# Altium PCB PCB2.PcbDoc (part 1 of 2)
Units mm, origin at the board's own origin, x right, y up, seen from the top; angles counter-clockwise.
Board outline 247 x 102 mm, 2 copper layers (Top Layer, Bottom Layer); 201 components, 195 nets, 868 pads, 143 vias.
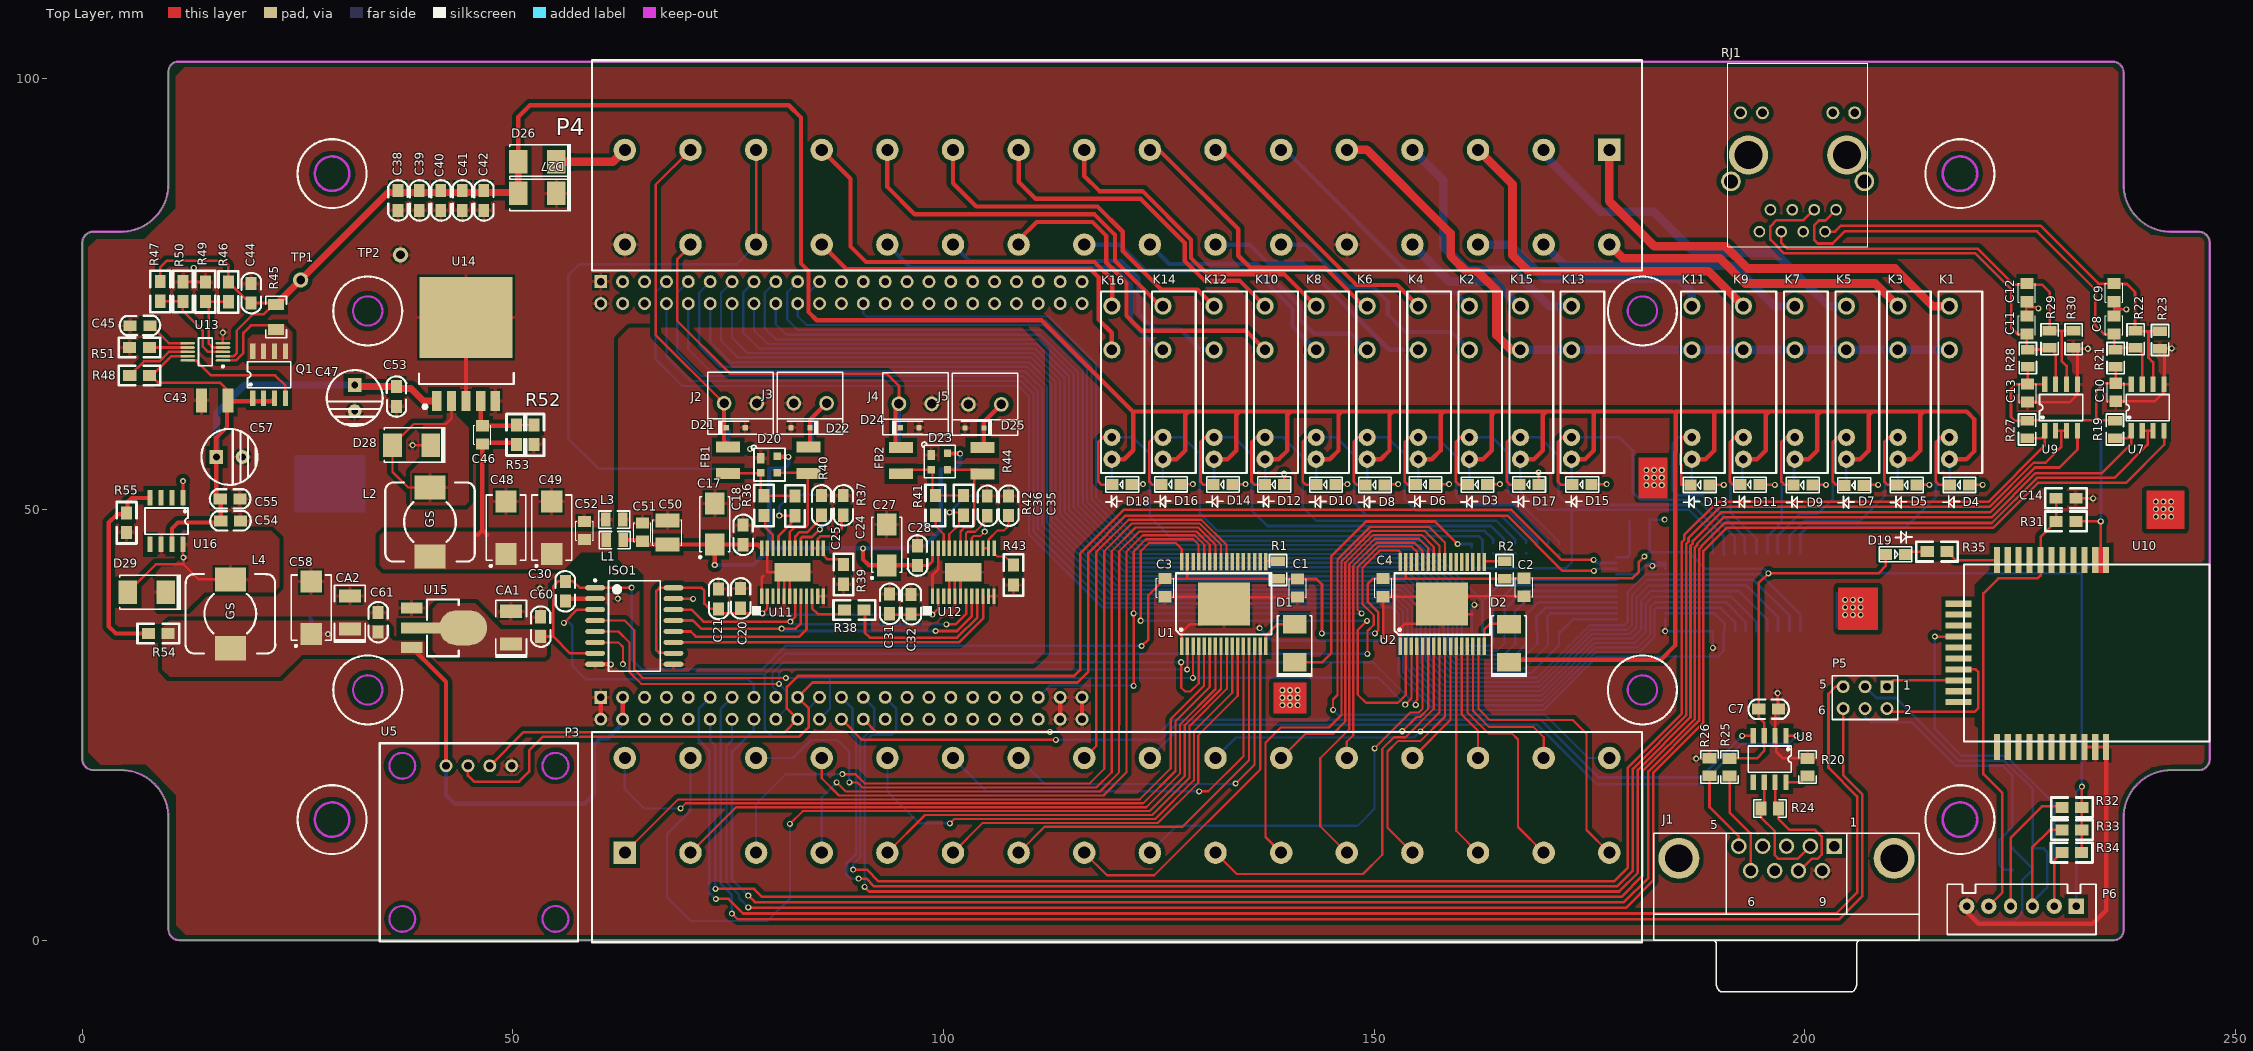
[diagram p0: Top Layer view]
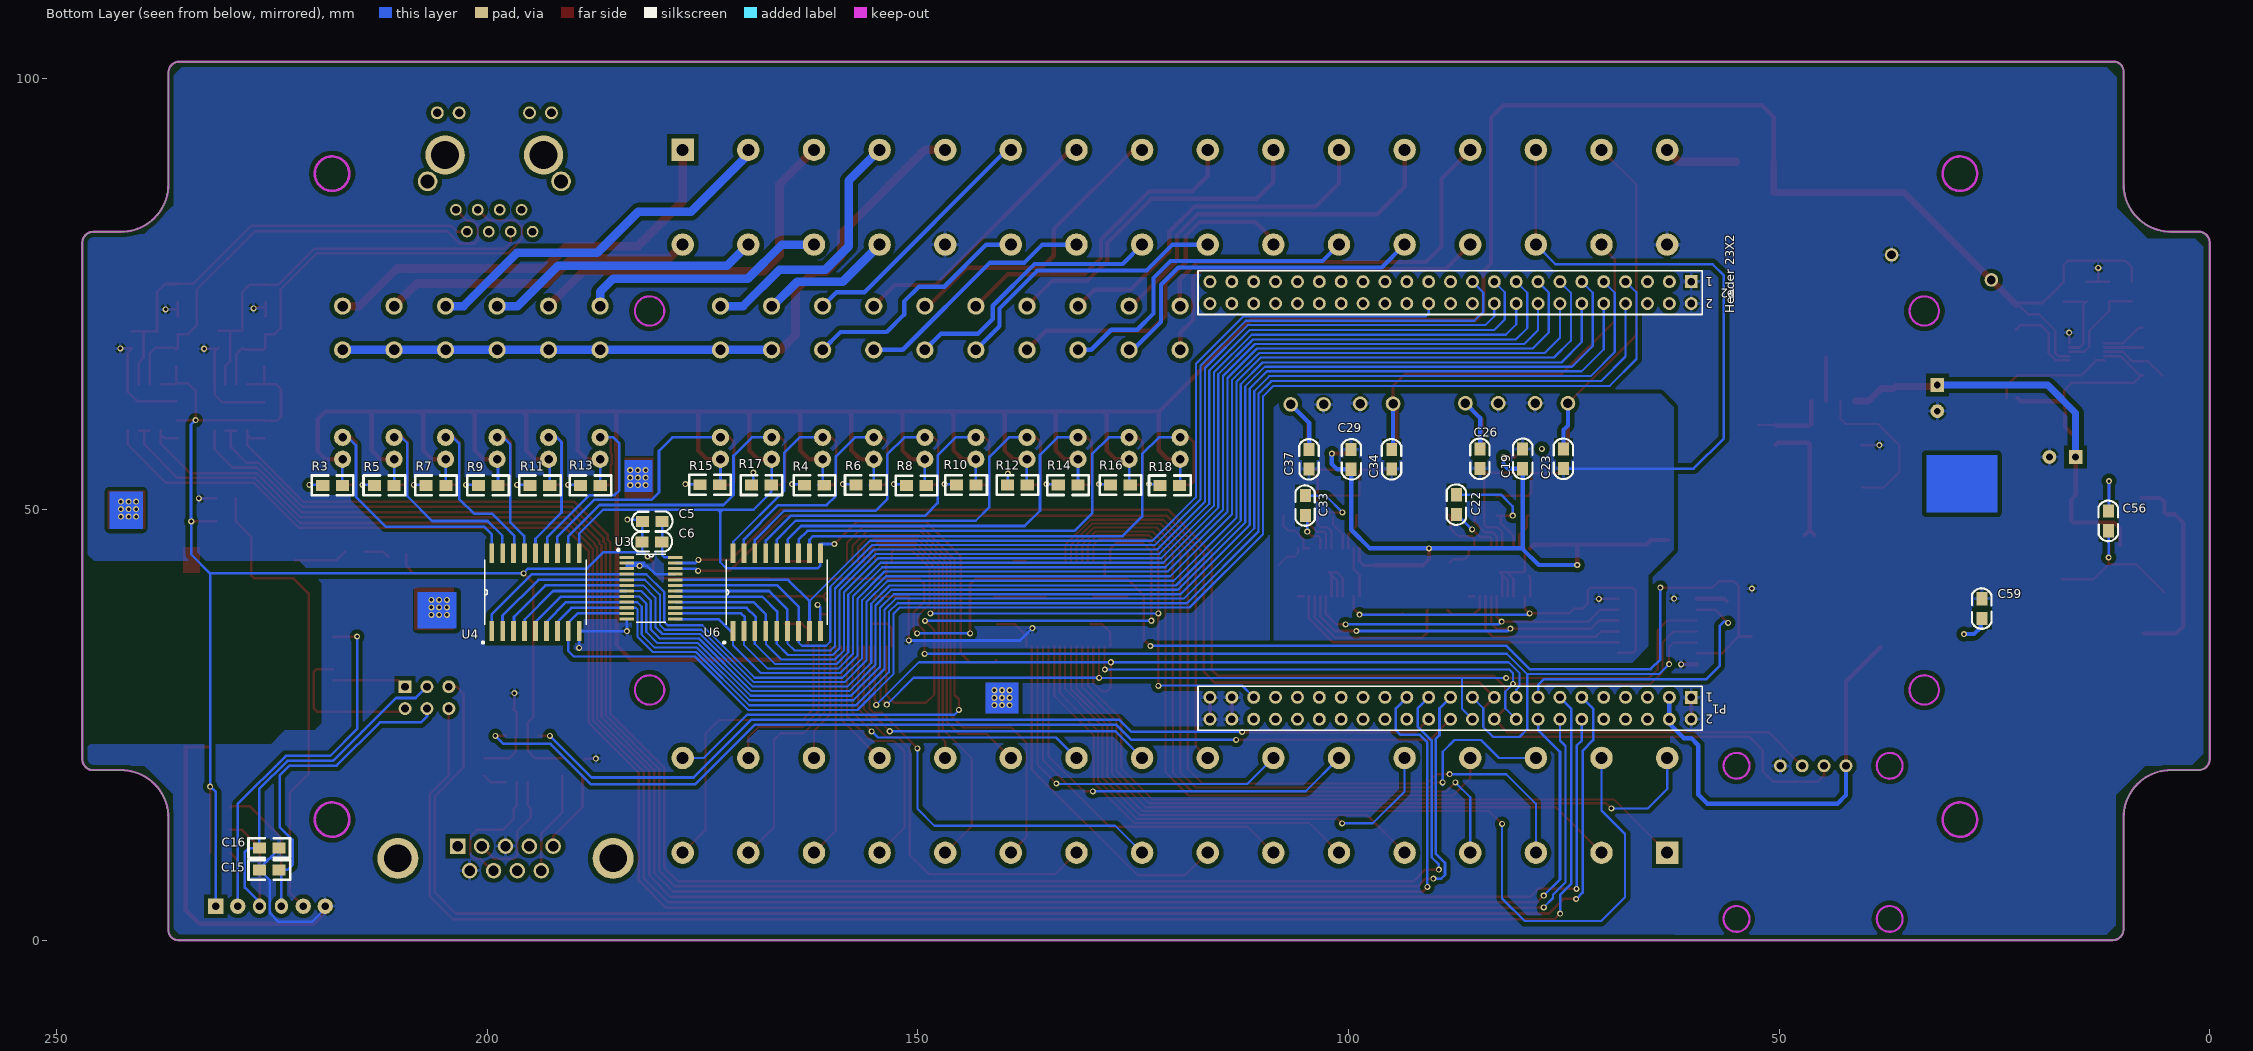
[diagram p1: Bottom Layer view, seen from below]

## Layer stack, top to bottom
Top Solder: solder mask 0.0102, Solder Resist, Dk 3.5
Top Layer: signal copper 0.0356
Dielectric1: dielectric 0.32, FR-4, Dk 4.8
Bottom Layer: signal copper 0.0356
Bottom Solder: solder mask 0.0102, Solder Resist, Dk 3.5

## Board outline
1.27,19.75 4.5,19.75 cw(c4.5,14.25) 10,14.25 10,1.27 ccw(c11.27,1.27) 11.27,0 235.857,0 ccw(c235.857,1.143) 237,1.143 237,14.243 cw(c242.5,14.243) 242.5,19.743 245.73,19.743 ccw(c245.73,21.013) 247,21.013 247,80.98 ccw(c245.73,80.98) 245.73,82.25 242.5,82.25 cw(c242.5,87.75) 237,87.75 237,100.73 ccw(c235.73,100.73) 235.73,102 11.143,102 ccw(c11.143,100.857) 10,100.857 10,87.757 cw(c4.5,87.757) 4.5,82.257 1.27,82.257 ccw(c1.27,80.987) 0,80.987 0,21.02 ccw(c1.27,21.02)

## Design rules (kind name [scope] priority, off if disabled: settings)
Clearance Clearance_1 [InPolygon] p1: gap=0.508
Clearance [All] p2: gap=0.2
ComponentClearance [All] p1: gap=0 collisioncheckmode=3 verticalgap=0 showdistances=FALSE
FabricationTestPointUsage TestPointUsage [All] p1: valid=0 allowmultiple=FALSE
FabricationTestpoint Testpoint [All] p1: side=3 testpointundercomponent=TRUE minsize=1.016 maxsize=2.54 preferedsize=1.524 minholesize=0 maxholesize=1.016 preferedholesize=0.813 testpointgrid=0.025 allowsidetop=TRUE allowsidebottom=TRUE usegrid=TRUE gridtolerance=0
Height [All] p1: minheight=0 maxheight=1873.374 prefheight=0
HoleSize [All] p1: absolutevalues=TRUE maxlimit=3.25 minlimit=0.025 maxpercent=80.000 minpercent=20.000
HoleToHoleClearance [All] p1: gap=0.2 allowstackedmicrovias=TRUE
MinimumSolderMaskSliver [All] p1: minsoldermaskwidth=0.2
PolygonConnect [All] p1: connectstyle=Relief reliefconductorwidth=0.4 reliefentries=4 polygonreliefangle="90 Angle" airgapwidth=0.254
RoutingVias [All] p1: holewidth=0.4 width=0.7 viastyle="Through Hole" minholewidth=0.15 minwidth=0.3 maxholewidth=0.711 maxwidth=1.27
SilkToSilkClearance [All] p1: silktosilkclearance=0.2
SilkToSolderMaskClearance [IsPad] p1: minsilkscreentomaskgap=0.2 clearancetoexposedcopper=TRUE
SolderMaskExpansion [All] p1: expansion=0.102
Width [All] p1: maxlimit=2 minlimit=0.254 preferedwidth=0.3 minimp=50.000000 maximp=50.000000 favimp=50.000000
20 further rules are at their usual default settings.

## Classes and differential pairs
component class Designator: C17 C18 C19 C20 C21 C22 C23 C24 C25 C26 C27 C28 C29 C30 C31 C32 C33 C34 C35 C36 C37 D20 D21 D22 D23 D24 D25 FB1 FB2 ISO1 J2 J3 J4 J5 R36 R37 R38 R39 R40 R41 R42 R43 R44 U11 U12
component class Designator: C7 C8 C9 C10 C11 C12 C13 C14 C15 C16 D19 J1 P5 P6 R19 R20 R21 R22 R23 R24 R25 R26 R27 R28 R29 R30 R31 R32 R33 R34 R35 RJ1 U7 U8 U9 U10
component class Designator: C5 C6 D3 D4 D5 D6 D7 D8 D9 D10 D11 D12 D13 D14 D15 D16 D17 D18 K1 K2 K3 K4 K5 K6 K7 K8 K9 K10 K11 K12 K13 K14 K15 K16 R3 R4 R5 R6 R7 R8 R9 R10 R11 R12 R13 R14 R15 R16 R17 R18 U3 U4 U5 U6
component class Designator: C1 C2 C3 C4 D1 D2 R1 R2 U1 U2
component class Designator: P1 P2 P3 P4
component class Designator: C38 C39 C40 C41 C42 C43 C44 C45 C46 C47 C48 C49 C50 C51 C52 C53 C54 C55 C56 C57 C58 C59 C60 C61 CA1 CA2 D26 D27 D28 D29 L1 L2 L3 L4 Q1 R45 R46 R47 R48 R49 R50 R51 R52 R53 R54 R55 TP1 TP2 U13 U14 U15 U16
net class PB[0..7]: PB0 PB1 PB2 PB3 PB4 PB5 PB6 PB7
net class PA[0..7]: PA0 PA1 PA2 PA3 PA4 PA5 PA6 PA7

## Components (designator, comment, footprint, x,y, rotation, side; value= is the part's Value field where it differs from the comment)
C1 "Cap" C-0805 142.01,39.19 r90 top
C2 "0.1uF/10%/0805/50VDC" C-0805 168.28,39.28 r90 top
C3 "Cap" C-0805 126.6,39.23 r90 top
C4 "0.1uF/10%/0805/50VDC" C-0805 151.94,39.23 r90 top
C5 "Cap" 0805_cap 179.99,48.5 r0 bottom
C6 "Cap" 0805_cap 180.03,46.13 r0 bottom
C7 "" 0805_cap 194.95,26.95 r0 top
C8 "0.1uF/10%/0805/50VDC" C-0805 235,73.12 r270 top
C9 "0.1uF/10%/0805/50VDC" C-0805 236.8,73.48 r90 top
C10 "0.1uF/10%/0805/50VDC" C-0805 235.19,65.32 r270 top
C11 "0.1uF/10%/0805/50VDC" C-0805 224.87,73.12 r270 top
C12 "0.1uF/10%/0805/50VDC" C-0805 226.67,73.48 r90 top
C13 "0.1uF/10%/0805/50VDC" C-0805 224.96,65.22 r270 top
C14 "0.1uF" C0805 228.92,51.31 r180 top
C15 "101" C0805 223.89,8.17 r180 bottom
C16 "101" C0805 226.69,10.7 r0 bottom
C17 "293D475X9035C2TE3" 6032-28 73.44,48.31 r90 top
C18 "GRM188R71H104KA93D" 0805_cap 76.6,46.22 r90 top
C19 "GRM188R71H104KA93D" 0805_cap 79.883,55.05 r90 bottom
C20 "GRM188R71H104KA93D" 0805_cap 76.31,38.85 r90 top
C21 "GRM188R71H104KA93D" 0805_cap 73.75,38.78 r90 top
C22 "GRM1885C1H222JA01D" 0805_cap 87.33,51.41 r270 bottom
C23 "06035C104KAT2A" 0805_cap 74.91,56.73 r270 bottom
C24 "06035C104KAT2A" 0805_cap 88.24,49.65 r90 top
C25 "C1608X7R1H223K" 0805_cap 85.7,49.65 r90 top
C26 "06035C104KAT2A" 0805_cap 84.6,56.73 r270 bottom
C27 "293D475X9035C2TE3" 6032-28 93.39,45.9 r90 top
C28 "GRM188R71H104KA93D" 0805_cap 96.84,43.82 r90 top
C29 "GRM188R71H104KA93D" 0805_cap 99.79,54.99 r90 bottom
C30 "GRM188R71H104KA93D" 0805_cap 56.21,41.35 r270 top
C31 "GRM188R71H104KA93D" 0805_cap 93.61,38.21 r90 top
C32 "GRM188R71H104KA93D" 0805_cap 96.13,38.17 r90 top
C33 "GRM1885C1H222JA01D" 0805_cap 104.89,51.3 r270 bottom
C34 "06035C104KAT2A" 0805_cap 94.86,56.67 r270 bottom
C35 "06035C104KAT2A" 0805_cap 107.42,49.61 r90 top
C36 "C1608X7R1H223K" 0805_cap 104.96,49.59 r90 top
C37 "06035C104KAT2A" 0805_cap 104.44,56.67 r270 bottom
C38 "Cap" 0805_cap 36.52,85.05 r90 top
C39 "Cap" 0805_cap 39.015,85.05 r90 top
C40 "Cap" 0805_cap 41.51,85.05 r90 top
C41 "Cap" 0805_cap 44.005,85.05 r90 top
C42 "Cap" 0805_cap 46.5,85.05 r90 top
C43 "GRM32ER72A225KA35L" 1210 15.37,62.67 r0 top
C44 "06031C102JAT2A" 0805_cap 19.49,74.29 r90 top
C45 "UMK107ABJ474KA-T" 0805_cap 7.53,71.23 r180 top
C46 "0.1uF/50V" C-0805 45.55,60.37 r270 top
C47 "220μF" CZ3.0/6.5 31.63,62.94 r90 top
C48 "476C" 7343-43 49.21,47.89 r90 top
C49 "476C" 7343-43 54.501,47.89 r90 top
C50 "10uF/10%/1210/16VDC" C-1210 66.23,49.54 r270 top
C51 "0.1uF/10%/0805/50VDC" C-0805 64.12,49.08 r270 top
C52 "0.1UF" C-0805 57.4,49.26 r270 top
C53 "0.1uF" 0805_CAP 36.61,63.96 r270 top
C54 "4.7μF/10%/0805" 0805_CAP 18.05,48.56 r180 top
C55 "4.7μF/10%/0805" 0805_CAP 18,51.1 r180 top
C56 "0.01μF/10%/0805" 0805_CAP 11.64,49.52 r270 bottom
C57 "220μF" CZ3.0/6.5 17.09,56.11 r180 top
C58 "476C" 7343-43 26.58,38.6 r90 top
C59 "0.1μf/10%/0805" 0805_CAP 26.34,39.34 r270 bottom
C60 "0.1uF" 0805_CAP 53.09,35.57 r90 top
C61 "0.1uF" 0805_CAP 34.21,36.09 r90 top
CA1 "4.7UF/16V" 3528cap 49.82,34.4 r90 top
CA2 "10UF/16V" 3528cap 31.1,36.16 r90 top
D1 "SMB" SMB 140.76,34.47 r90 top
D2 "SMB" SMB 165.65,34.47 r90 top
D3 "LED3" 0805LED 161.95,52.9 r180 top
D4 "LED3" 0805LED 217.92,52.88 r180 top
D5 "LED3" 0805LED 211.79,52.86 r180 top
D6 "LED3" 0805LED 155.92,52.92 r180 top
D7 "LED3" 0805LED 205.69,52.83 r180 top
D8 "LED3" 0805LED 150.05,52.88 r180 top
D9 "LED3" 0805LED 199.72,52.85 r180 top
D10 "LED3" 0805LED 144.36,52.9 r180 top
D11 "LED3" 0805LED 193.59,52.9 r180 top
D12 "LED3" 0805LED 138.36,52.92 r180 top
D13 "LED3" 0805LED 187.76,52.88 r180 top
D14 "LED3" 0805LED 132.41,52.92 r180 top
D15 "LED3" 0805LED 174.1,52.92 r180 top
D16 "LED3" 0805LED 126.36,52.94 r180 top
D17 "LED3" 0805LED 167.94,52.92 r180 top
D18 "LED3" 0805LED 120.7,52.92 r180 top
D19 "VDD33" 0805LED 210.55,44.79 r0 top
D20 "" SOT-143 78.78,56.17 r0 top
D21 "CDSOD323-T15SC" sod-323 75.87,59.5 r0 top
D22 "CDSOD323-T15SC" sod-323 83.4,59.5 r180 top
D23 "" SOT-143 98.56,56.53 r0 top
D24 "" sod-323 96.06,59.5 r0 top
D25 "" sod-323 103.59,59.45 r180 top
D26 "B540C-13-F" SMB 52.823,90.36 r180 top
D27 "SMCJ26CA" SMB 52.83,86.71 r180 top
D28 "D Schottky" SMB 38.23,57.48 r180 top
D29 "SMB" SMB 7.5,40.4 r180 top
FB1 "MH3261-501Y" 1210 74.98,55.73 r270 top
FB2 "MH3261-501Y" 1210 95.05,55.68 r270 top
ISO1 "ISO7641FCDW" M16B_N 64.09,36.48 r0 top
J1 "" CONN_1734348-1 197.866,0 r180 top
J2 "VOUT" ED555/2DS 74.51,62.34 r0 top
J3 "IOUT" ED555/2DS 82.6,62.34 r0 top
J4 "VOUT" ED555/2DS 94.82,62.29 r0 top
J5 "IOUT" ED555/2DS 102.89,62.21 r0 top
K1 "Relay-SPST" PA1a-24v 215.504,54.232 r90 top
K2 "Relay-SPST" PA1a-24v 159.769,54.232 r90 top
K3 "Relay-SPST" PA1a-24v 209.525,54.232 r90 top
K4 "Relay-SPST" PA1a-24v 153.84,54.232 r90 top
K5 "Relay-SPST" PA1a-24v 203.546,54.232 r90 top
K6 "Relay-SPST" PA1a-24v 147.91,54.232 r90 top
K7 "Relay-SPST" PA1a-24v 197.567,54.232 r90 top
K8 "Relay-SPST" PA1a-24v 141.981,54.232 r90 top
K9 "Relay-SPST" PA1a-24v 191.589,54.232 r90 top
K10 "Relay-SPST" PA1a-24v 136.051,54.232 r90 top
K11 "Relay-SPST" PA1a-24v 185.61,54.232 r90 top
K12 "Relay-SPST" PA1a-24v 130.122,54.232 r90 top
K13 "Relay-SPST" PA1a-24v 171.628,54.232 r90 top
K14 "Relay-SPST" PA1a-24v 124.192,54.232 r90 top
K15 "Relay-SPST" PA1a-24v 165.699,54.232 r90 top
K16 "Relay-SPST" PA1a-24v 118.263,54.232 r90 top
L1 "0R/5%/0805/1/8W" R-0805 60.31,45.56 r0 top
L2 "GSRH129-470M" GSDS104C2 40.37,48.55 r0 top
L3 "0R/5%/0805/1/8W" R-0805 60.27,47.93 r0 top
L4 "15μH" GSDS104C2 17.19,37.9 r0 top
P1 "Header 23X2" HDR2X23 60.198,28.198 r0 bottom
P2 "Header 23X2" HDR2X23 60.198,76.454 r0 bottom
P3 "Header 16X2" CON16X2-8.5 62.992,10.16 r90 top locked
P4 "Header 16X2" CON16X2-8.5 177.292,91.76 r270 top locked
P5 "Header 3X2" HDR2X3 209.52,29.43 r180 top
P6 "ISP" SIP-6B 231.5,3.95 r180 top
Q1 "FDS8870" SO-G8 21.7,65.65 r0 top
R1 "10K/1%/0805/1/8W" R-0805 139.74,41.48 r90 top
R2 "10K/1%/0805/1/8W" R-0805 166.05,41.48 r90 top
R3 "Res3" 0805 216.8,52.81 r0 bottom
R4 "Res3" 0805 160.86,52.82 r0 bottom
R5 "Res3" 0805 210.79,52.81 r0 bottom
R6 "Res3" 0805 154.89,52.86 r0 bottom
R7 "Res3" 0805 204.79,52.81 r0 bottom
R8 "Res3" 0805 151.3,52.79 r180 bottom
R9 "Res3" 0805 198.73,52.81 r0 bottom
R10 "Res3" 0805 145.52,52.84 r180 bottom
R11 "Res3" 0805 192.73,52.81 r0 bottom
R12 "Res3" 0805 139.58,52.84 r180 bottom
R13 "Res3" 0805 186.86,52.81 r0 bottom
R14 "Res3" 0805 133.69,52.83 r180 bottom
R15 "Res3" 0805 172.99,52.88 r0 bottom
R16 "Res3" 0805 127.61,52.84 r180 bottom
R17 "Res3" 0805 167.01,52.83 r0 bottom
R18 "Res3" 0805 121.88,52.81 r180 bottom
R19 "10K/1%/0805/1/8W" R-0805 236.89,57.8 r90 top
R20 "CRCW080560R4FKEA" 0805_HV 200.3,20.1 r90 top
R21 "47K/5%/0805/1/8W" R-0805 235.17,69.08 r270 top
R22 "12K/1%/0805/1/8W" R-0805 237.49,71.28 r270 top
R23 "47K/5%/0805/1/8W" R-0805 240.34,71.18 r270 top
R24 "CRCW080560R4FKEA" 0805_HV 195.93,15.28 r180 top
R25 "CRCW080560R4FKEA" 0805_HV 191.26,20.1 r90 top
R26 "CRCW080560R4FKEA" 0805_HV 188.91,20.11 r270 top
R27 "10K/1%/0805/1/8W" R-0805 226.71,57.8 r90 top
R28 "47K/5%/0805/1/8W" R-0805 224.98,69.08 r270 top
R29 "12K/1%/0805/1/8W" R-0805 227.51,71.28 r270 top
R30 "47K/5%/0805/1/8W" R-0805 230.3,71.28 r270 top
R31 "Res2" 0805 229.17,48.63 r0 top
R32 "3.3k" R0805 229.61,15.43 r180 top
R33 "3.3k" R0805 229.61,12.81 r180 top
R34 "Res2" R0805 232.38,10.17 r0 top
R35 "620Ω" R0805 213.95,45.11 r180 top
R36 "CRCW060315R0JNEA" 0805 79.15,49.31 r90 top
R37 "CRCW060315R0JNEA" 0805 82.75,49.28 r90 top
R38 "Res3" 0805 90.78,38.33 r180 top
R39 "RT0603BRD0715KL" 0805 88.38,41.32 r90 top
R40 "RPC2512JT15R0" 1210 84.3,55.73 r270 top
R41 "CRCW060315R0JNEA" 0805 99.04,49.34 r90 top
R42 "CRCW060315R0JNEA" 0805 102.31,49.34 r90 top
R43 "RT0603BRD0715KL" 0805 108.11,41.26 r90 top
R44 "RPC2512JT15R0" 1210 104.5,55.66 r270 top
R45 "PRL1632-R020-F-T1" 1206 22.5,72.35 r270 top
R46 "CRCW060395K3FKEA" 0805 16.96,74.13 r90 top
R47 "CRCW060347K5FKEA" 0805 9.05,74.18 r90 top
R48 "CRCW060310K0FKEA" 0805 7.79,65.56 r180 top
R49 "CRCW06037K50FKEA" 0805 14.28,76.44 r270 top
R50 "CRCW060315K8FKEA" 0805 11.68,76.45 r270 top
R51 "RG1608P-563-B-T5" 0805 5.5,68.81 r0 top
R52 "1K/1%/0805" 0805 52.47,59.82 r270 top
R53 "4.7K/1%/0805" 0805 50.4,57.54 r90 top
R54 "10K" 0805 7.68,35.6 r0 top
R55 "3.24K/1%/0805" 0805 5.15,49.61 r270 top
RJ1 "HR911105A-RJ45" HR911105A 199.16,91.16 r0 top
TP1 "TP-040_RND" TP-040_RND 25.35,76.66 r0 top
TP2 "TP-040_RND" TP-040_RND 36.94,79.57 r0 top
U1 "MC33975" SOIC-32 137.41,34.13 r90 top
U2 "MC33975" SOIC-32 162.76,34.11 r90 top
U3 "PCA9555" PW24 180.95,40.87 r180 bottom
U4 "ULN2803A_DW_18" DW18 194.38,40.4 r90 bottom
U5 "MPU6050-MODULE" MPU6050-MODULE 34.544,22.86 r0 top
U6 "ULN2803A_DW_18" DW18 166.38,40.4 r90 bottom
U7 "MAX3485/SO-8" SO-G8 239.81,61.84 r0 top
U8 "SN65HVD230" SO-G8 195.9,21.03 r180 top
U9 "MAX3485/SO-8" SO-G8 229.76,61.84 r0 top
U10 "STM32W108-3" STM32W108-3 218.47,23.06 r0 top locked
U11 "DAC8760IPWP" PWP24-DIE84X166 82.45,42.72 r90 top
U12 "DAC8760IPWP" PWP24-DIE84X166 102.28,42.72 r90 top
U13 "LM5069MM-2/NOPB" MUB10A_N 14.28,68.31 r180 top
U14 "LM2596S-ADJ" TO-263(S)-5 44.58,71.21 r0 top
U15 "AS1117-3.3V" SOT-223 44.19,36.27 r270 top
U16 "TPS5430" SO-G8 9.77,48.65 r180 top

## Footprints (in the part's own frame and the unit in brackets; to place one, negate y for a bottom-side part, rotate by r counter-clockwise, add the part's x,y. Pads: shape width x height; smd on the part's side, far side on the other; paste and mask are expansions set on the pad)
0805 [mil]
  rect 60x50 smd: 1(0,0) 2(90,0)
  silkscreen extent -50,-45 140,45
0805_cap [mm]
  rect 1.524x1.27 smd: 1(-0.31,-0.11) 2(1.976,-0.11)
  silkscreen extent -1.51,-1.26 3.19,0.99
0805_CAP [mm]
  rect 1.524x1.27 smd: 1(-0.31,-0.11) 2(1.976,-0.11)
  silkscreen extent -1.51,-1.26 3.19,0.99
0805_HV [mil] "0805 with 30mil clearance between pads"
  rect 50x63 smd: 1(-40,0) 2(40,0)
  silkscreen extent -74,-40 74,40, body extent -43,-29 43,29, height 43
0805LED [mm]
  rect 1.4x1.27 smd: 1(-1.143,0.013) 2(1.067,0.013)
  silkscreen extent -1.94,-0.88 1.88,2.67
1206 [mm] "1206 from SM-752 data"
  rect 1.3x1.85 smd: 1(-1.45,0) 2(1.45,0)
  silkscreen extent -2.4,-1.21 2.4,1.21, body extent -1.7,-0.9 1.7,0.9, height 1.35
1210 [mil]
  rect 50x110 smd mask+2: 1(60,0) 2(-60,0)
3528cap [mil]
  rect 60x100 smd: 1(-1,1) 2(149,1)
  silkscreen extent -61,-69 199,71
6032-28 [mm] "Medium Density IPC based on Vishay Sprague 293D datasheet."
  rect 2.55x2.3 smd: 1(-2.375,0) 2(2.375,0)
  silkscreen extent -3.96,-1.75 3.2,1.82, body extent -3.15,-1.75 3.15,1.75, height 2.8
7343-43 [mm] "Medium density IPC based on Kemet T495 series"
  rect 2.55x2.45 smd: 1(-3.025,0) 2(3.025,0)
  silkscreen extent -4.56,-2.3 3.8,2.3, body extent -3.8,-2.3 3.8,2.3, height 4.3
C0805 [mil]
  rect 60x50 smd: 1(-100,0) 2(-10,0)
  silkscreen extent -150,-45 40,45
C-0805 [mm]
  rect 1.3x1.5 smd: 1(0.65,0.9) 2(2.75,0.9)
  silkscreen extent 0.6,-0.1 2.8,1.9
C-1210 [mm]
  rect 1.6x2.8 smd: 1(0.8,1.7) 2(3.6,1.7)
  silkscreen extent 0.7,0.03 3.7,3.37
CON16X2-8.5 [mm]
  rect 2.6x2.6 hole 1.4: 1(0,0)
  round 2.6 hole 1.4: 2(11,0) 3(0,-7.62) 4(11,-7.62) 5(0,-15.24) 6(11,-15.24) 7(0,-22.86) 8(11,-22.86) 9(0,-30.48) 10(11,-30.48) 11(0,-38.1) 12(11,-38.1) 13(0,-45.72) 14(11,-45.72) 15(0,-53.34) 16(11,-53.34) 17(0,-60.96) 18(11,-60.96) 19(0,-68.58) 20(11,-68.58) 21(0,-76.2) 22(11,-76.2) 23(0,-83.82) 24(11,-83.82) 25(0,-91.44) 26(11,-91.44) 27(0,-99.06) 28(11,-99.06) 29(0,-106.68) 30(11,-106.68) 31(0,-114.3) 32(11,-114.3)
  silkscreen extent -10.4,-118.11 14,3.81
CONN_1734348-1 [mm] "Connector; D Subminiature 9 Position; Right Angle"
  rect 1.8x1.8 hole 1.2: 1(-5.54,-10.92)
  round 1.8 hole 1.2: 2(-2.77,-10.92) 3(0,-10.92) 4(2.77,-10.92) 5(5.54,-10.92) 6(-4.155,-8.08) 7(-1.385,-8.08) 8(1.385,-8.08) 9(4.155,-8.08)
  round 4.76 hole 3.18: 10(-12.495,-9.5) 11(12.495,-9.5)
  silkscreen extent -15.4,-12.4 15.4,6, body extent -15.4,-12.4 15.4,6.02, height 12.52
CZ3.0/6.5 [mm]
  rect 1.6x1.6 hole 0.8: 1(1.524,0)
  round 1.6 hole 0.8: 2(-1.524,0)
  silkscreen extent -3.25,-3.25 3.25,3.25
DW18 [mil]
  rect 91x22 smd: 1(-178,200) 2(-178,150) 3(-178,100) 4(-178,50) 5(-178,0) 6(-178,-50) 7(-178,-100) 8(-178,-150) 9(-178,-200) 10(178,-200) 11(178,-150) 12(178,-100) 13(178,-50) 14(178,0) 15(178,50) 16(178,100) 17(178,150) 18(178,200)
  silkscreen extent -235,-232 150,245
ED555/2DS [mm] "TERMINAL BLOCK 3.5MM 2POS PCB"
  round 1.7 hole 1.1: 1(0,0) 2(3.81,0)
  silkscreen extent -1.91,-3.6 5.71,3.6, body extent -1.9,-3.6 5.72,3.7, height 8.52
GSDS104C2 [mm]
  rect 3.6x2.8 smd: 1(0,4) 2(0,-4)
  silkscreen extent -5.2,-4.6 5.21,4.6
HDR2X3 [mm] "Connector; Header; 3x2 Position"
  rect 1.5x1.5 hole 0.9: 1(0,0)
  round 1.5 hole 0.9: 2(0,2.54) 3(2.54,0) 4(2.54,2.54) 5(5.08,0) 6(5.08,2.54)
  silkscreen extent -1.27,-1.27 6.35,3.81
HDR2X23 [mm] "Connector; Header; 23x2 Position"
  rect 1.5x1.5 hole 0.9: 1(0,0)
  round 1.5 hole 0.9: 2(0,2.54) 3(2.54,0) 4(2.54,2.54) 5(5.08,0) 6(5.08,2.54) 7(7.62,0) 8(7.62,2.54) 9(10.16,0) 10(10.16,2.54) 11(12.7,0) 12(12.7,2.54) 13(15.24,0) 14(15.24,2.54) 15(17.78,0) 16(17.78,2.54) 17(20.32,0) 18(20.32,2.54) 19(22.86,0) 20(22.86,2.54) 21(25.4,0) 22(25.4,2.54) 23(27.94,0) 24(27.94,2.54) 25(30.48,0) 26(30.48,2.54) 27(33.02,0) 28(33.02,2.54) 29(35.56,0) 30(35.56,2.54) 31(38.1,0) 32(38.1,2.54) 33(40.64,0) 34(40.64,2.54) 35(43.18,0) 36(43.18,2.54) 37(45.72,0) 38(45.72,2.54) 39(48.26,0) 40(48.26,2.54) 41(50.8,0) 42(50.8,2.54) 43(53.34,0) 44(53.34,2.54) 45(55.88,0) 46(55.88,2.54)
  silkscreen extent -1.27,-1.27 57.28,3.81
HR911105A [mm]
  round 1.35 hole 0.89: 1(4.46,-6.35) 2(3.18,-8.89) 3(1.92,-6.35) 4(0.64,-8.89) 5(-0.62,-6.35) 6(-1.9,-8.89) 7(-3.16,-6.35) 8(-4.44,-8.89)
  round 1.5 hole 1.02: 9(6.625,4.9) 10(4.085,4.9) 11(-4.085,4.9) 12(-6.625,4.9)
  round 2.286 hole 1.63: ""(-7.745,-3.05) ""(7.745,-3.05)
  round 4.572 hole 3.25: ""(-5.715,0) ""(5.715,0)
  silkscreen extent -8.13,-10.67 8.13,10.67
M16B_N [mm] "SOIC, 16-Leads, Body 10.3x7.5mm, Pitch 1.27mm, IPC Medium Density"
  oval 2.3x0.6 smd: 1(-4.55,4.445) 2(-4.55,3.175) 3(-4.55,1.905) 4(-4.55,0.635) 5(-4.55,-0.635) 6(-4.55,-1.905) 7(-4.55,-3.175) 8(-4.55,-4.445) 9(4.55,-4.445) 10(4.55,-3.175) 11(4.55,-1.905) 12(4.55,-0.635) 13(4.55,0.635) 14(4.55,1.905) 15(4.55,3.175) 16(4.55,4.445)
  silkscreen extent -4.67,-5.25 3,5.42, body extent -3.75,-5.25 3.75,5.25, height 2.65
MPU6050-MODULE [mm]
  round 1.5 hole 0.9: 1(7.69,-2.61) 2(10.23,-2.61) 3(12.77,-2.61) 4(15.31,-2.61)
  Keep-Out Layer circle w0.254: c2.61,-2.61 r1.5
  Keep-Out Layer circle w0.254: c20.39,-2.61 r1.5
  Keep-Out Layer circle w0.254: c2.61,-20.39 r1.5
  Keep-Out Layer circle w0.254: c20.39,-20.39 r1.5
  silkscreen extent 0,-23 23,0
MUB10A_N [mm] "TSSOP, 10-Leads, Body 3x3mm, Pitch 0.5mm, IPC Medium Density"
  oval 1.7x0.3 smd: 1(-2.05,1) 2(-2.05,0.5) 3(-2.05,0) 4(-2.05,-0.5) 5(-2.05,-1) 6(2.05,-1) 7(2.05,-0.5) 8(2.05,0) 9(2.05,0.5) 10(2.05,1)
  silkscreen extent -2.17,-1.6 0.8,1.82, body extent -1.6,-1.6 1.6,1.6, height 1.09
PA1a-24v [mm]
  round 2 hole 1.2: 1(19.39,-1.27) 2(14.31,-1.27)
  round 2 hole 1: 3(4.15,-1.27) 4(1.61,-1.27)
  silkscreen extent 0,-5.08 21.08,0
PW24 [mil]
  rect 66x14 smd: 1(-111,140.75) 2(-111,115.16) 3(-111,89.57) 4(-111,63.98) 5(-111,38.39) 6(-111,12.8) 7(-111,-12.8) 8(-111,-38.39) 9(-111,-63.98) 10(-111,-89.57) 11(-111,-115.16) 12(-111,-140.75) 13(111,-140.75) 14(111,-115.16) 15(111,-89.57) 16(111,-63.98) 17(111,-38.39) 18(111,-12.8) 19(111,12.8) 20(111,38.39) 21(111,63.98) 22(111,89.57) 23(111,115.16) 24(111,140.75)
  silkscreen extent -155,-156 67,180
PWP24-DIE84X166 [mil]
  rect 70x15 smd: 1(-109.3,140.5) 2(-109.3,114.9) 3(-109.3,89.3) 4(-109.3,63.7) 5(-109.3,38.1) 6(-109.3,12.5) 7(-109.3,-13.1) 8(-109.3,-38.7) 9(-109.3,-64.3) 10(-109.3,-89.9) 11(-109.3,-115.5) 12(-109.3,-141.1) 13(109.7,-141.2) 14(109.7,-115.6) 15(109.7,-90) 16(109.7,-64.4) 17(109.7,-38.8) 18(109.7,-13.2) 19(109.7,12.4) 20(109.7,38) 21(109.7,63.6) 22(109.7,89.2) 23(109.7,114.8) 24(109.7,140.5)
  rect 84x166 smd: 25(0,-0.1)
  silkscreen extent -196,144 -156,184
R0805 [mil]
  rect 60x50 smd: 1(-100,0) 2(-10,0)
  silkscreen extent -150,-45 40,45
R-0805 [mm]
  rect 1.1x1.6 smd: 1(0.5,0.9) 2(2.5,0.9)
  silkscreen extent -0.3,-0.1 3.3,1.9
SIP-6B [mil]
  rect 70x70 hole 35: 1(0,0)
  round 70 hole 35: 2(100,0) 5(400,0) 6(500,0)
  oval 59.06x70 hole 35: 3(200,0) 4(300,0)
  silkscreen extent -90,-100 590,130
SMB [mm] "Molded Diode, 2-Leads, Body 5.4x3.6mm, IPC Medium Density, based on OnSemi component dimensions"
  rect 2.159x2.743 smd: 1(-2.21,0) 2(2.21,0)
  silkscreen extent -3.94,-2.08 3.17,2.08, body extent -2.7,-1.8 2.7,1.8, height 2.32
SO-G8 [mm]
  rect 0.6x1.8 smd: 1(-1.916,-2.7) 2(-0.646,-2.7) 3(0.624,-2.7) 4(1.894,-2.7) 5(1.894,2.7) 6(0.624,2.7) 7(-0.646,2.7) 8(-1.916,2.7)
  silkscreen extent -2.51,-1.52 2.49,1.52
sod-323 [mm] "NXP recommended land pattern"
  rect 0.6x0.6 smd paste-0.05: 1(-1.1,0) 2(1.1,0)
  silkscreen extent -2.06,-0.86 1.53,0.86, body extent -1.3,-0.67 1.3,0.68, height 1.1
SOIC-32 [mm]
  rect 5x6.05 smd mask+0.08: 0(4.9,4.875)
  rect 2.05x0.4 smd mask+0.08: 1(0,9.75) 2(0,9.1) 3(0,8.45) 4(0,7.8) 5(0,7.15) 6(0,6.5) 7(0,5.85) 8(0,5.2) 9(0,4.55) 10(0,3.9) 11(0,3.25) 12(0,2.6) 13(0,1.95) 14(0,1.3) 15(0,0.65) 16(0,0) 17(9.8,0) 18(9.8,0.65) 19(9.8,1.3) 20(9.8,1.95) 21(9.8,2.6) 22(9.8,3.25) 23(9.8,3.9) 24(9.8,4.55) 25(9.8,5.2) 26(9.8,5.85) 27(9.8,6.5) 28(9.8,7.15) 29(9.8,7.8) 30(9.8,8.45) 31(9.8,9.1) 32(9.8,9.75)
  silkscreen extent 1.35,-0.67 8.48,10.43
SOT-143 [mm]
  rect 0.85x1.2 smd: 1(0,-0.2)
  rect 0.85x0.85 smd: 2(0,-1.9) 3(1.9,-1.9) 4(1.9,0)
  silkscreen extent -1.1,-2.85 2.8,1.3, body extent -0.26,-2.41 2.16,0.51, height 1
SOT-223 [mil]
  rect 50x100 smd: 1(-90.5,-234) 3(90.5,-234)
  oval 160x220 smd: 2(0,1)
  rect 50x200 smd: 2(0,-184)
  silkscreen extent -130,-164 130,-19
STM32W108-3 [mm]
  rect 0.7x3 smd: 1(16.51,21.074) 2(15.24,21.074) 3(13.97,21.074) 4(12.7,21.074) 5(11.43,21.074) 6(10.16,21.074) 7(8.89,21.074) 8(7.62,21.074) 9(6.35,21.074) 10(5.08,21.074) 11(3.81,21.074) 22(3.81,-0.627) 23(5.08,-0.627) 24(6.35,-0.627) 25(7.62,-0.627) 26(8.89,-0.627) 27(10.16,-0.627) 28(11.43,-0.627) 29(12.7,-0.627) 30(13.97,-0.627) 31(15.24,-0.627) 32(16.51,-0.627)
  rect 3x0.7 smd: 12(-0.627,16.002) 13(-0.627,14.732) 14(-0.627,13.462) 15(-0.627,12.192) 16(-0.627,10.922) 17(-0.627,9.652) 18(-0.627,8.382) 19(-0.627,7.112) 20(-0.627,5.842) 21(-0.627,4.572)
  silkscreen extent 0,0 28.5,20.57
TO-263(S)-5 [mm]
  rect 10.8x9.4 smd: 0(-0.025,1.075)
  rect 1.07x2.3 smd: 1(-3.425,-8.611) 2(-1.725,-8.611) 3(-0.025,-8.611) 4(1.675,-8.611) 5(3.375,-8.611)
  silkscreen extent -5.49,-9.47 5.51,-5.36
TP-040_RND [mil]
  round 70 / inner round 62 / far side round 62 hole 40: 1(0,0)

## Part data
C1 C3 C5 C6 C38 C39 C40 C41 C42: "Capacitor"
C2 C4 C8 C9 C10 C11 C12 C13 C50 C51: library part ASC-0024CA
C7: library part C1005X7R1C103K, "CAP, CERM, 0.01uF, 16V, +/-10%, X7R, 0402"
C14 C15 C16 C46 C52 C54 C55 C56 C59: library part Cap, "Capacitor"
C17 C27: "CAP, TA, 4.7uF, 35V, +/-10%, 1.9 ohm, SMD"
C18 C19 C20 C21 C23 C24 C26 C28 C29 C30 C31 C32 C34 C35 C37: "CAP, CERM, 0.1uF, 50V, +/-10%, X7R, 0603"
C22 C33: "CAP, CERM, 2200pF, 50V, +/-5%, C0G/NP0, 0603"
C25 C36: "CAP, CERM, 0.022uF, 50V, +/-10%, X7R, 0603"
C43: "CAP, CERM, 2.2uF, 100V, +/-10%, X7R, 1210"
C44: "CAP, CERM, 1000pF, 100V, +/-5%, X7R, 0603"
C45: "CAP, CERM, 0.47uF, 50V, 10%, X5R, 0603"
C47 C48 C49 C57 C58: library part "Cap Pol1", "Polarized Capacitor (Radial)"
C53 C60 C61: library part C
CA1 CA2: library part ECAP
D1 D2 D29: library part "Diode 1N5408", "3 Amp Medium Power Silicon Rectifier Diode"
D3 D4 D5 D6 D7 D8 D9 D10 D11 D12 D13 D14 D15 D16 D17 D18: "Typical BLUE SiC LED"
D19: library part LED3, "Typical BLUE SiC LED"
D20 D23: library part CD143A-SR70, "IC TVS ARRAY 2-LINE 70V SOT-143"
D21 D22 D24 D25: library part SMAJ15CA, "DIODE TVS ARRAY 15V SOD323"
D26 D27: library part "D Schottky", "Schottky Diode"
FB1 FB2: library part Ferrite_Bead, "BEAD FERRITE 500 OHM 3.0A 3216"
ISO1: library part ISO7241, "ISOLATOR DGTL 25MBPS 4CH 16SOIC"
J1: library part 1734348-1, "Conn D-SUB RCPT R/A 9POS GOLD/FL, TH"
J2 J3 J4 J5: library part 1727010, "TERMINAL BLOCK 3.5MM 2POS PCB"
K1 K2 K3 K4 K5 K6 K7 K8 K9 K10 K11 K12 K13 K14 K15 K16: "Single-Pole Single-Throw Relay"
L1 L3: library part ASR-0010AA
L2 L4: library part Inductor, "Inductor"
P1 P2: "Header, 23-Pin, Dual row"
P3 P4: "Header, 16-Pin, Dual row"
P5: "Header, 3-Pin, Dual row"
P6: library part "Header 6", "Header, 6-Pin"
Q1: library part MOSFET_N_8
R1 R2 R19 R27: library part ASR-0030AA
R3 R4 R5 R6 R7 R8 R9 R10 R11 R12 R13 R14 R15 R16 R17 R18 R31 R34 R38: "Resistor"
R20 R24 R25 R26: "RES, 60.4 ohm, 1%, 0.125W, 0805"
R21 R23 R28 R30: library part ASR-0134BA
R22 R29: library part ASR-0028BA
R32 R33: library part Res3, "Resistor"
R35: library part RES, "R"
R36 R37 R41 R42: "RES, 15 ohm, 5%, 0.1W, 0603"
R39 R43: "RES, 15.0k ohm, 0.1%, 0.1W, 0603"
R40 R44: library part CRA2512-FZ-R080ELF, "RES 15 OHM 1W 5% 2512"
R45: "RES, 0.02 ohm, 1%, 1W, 1206"
R46: "RES, 95.3k ohm, 1%, 0.1W, 0603"
R47: "RES, 47.5k ohm, 1%, 0.1W, 0603"
R48: "RES, 10.0k ohm, 1%, 0.1W, 0603"
R49: "RES, 7.50k ohm, 1%, 0.1W, 0603"
R50: "RES, 15.8k ohm, 1%, 0.1W, 0603"
R51: "RES, 56.0k ohm, 0.1%, 0.1W, 0603"
R52 R53 R54 R55: library part Res2, "Resistor"
TP1 TP2: "Test Point, O.040 Hole"
U3: library part PCF8575_PW_24, "Imported"
U4 U6: "Imported"
U7 U9: library part MAX485
U11 U12: library part DAC8760IPWP_1, "1-Channel, 16-Bit, Programmable Current/Voltage Output DAC for 4-20mA Current Loop Applications"
U13: "Positive High Voltage Hot Swap / Inrush Current Controller with Power Limiting, 10-pin MSOP, Pb-Free"
U14: library part SWITCHING
U15: library part AS1117

## Free pads (board coordinates)
  round 1.524 hole 0.762: 0(101.092,21.16)

## Via types
v1: diameter 0.7, hole 0.4, Top Layer to Bottom Layer, 143 vias

## Nets (pads, with @x,y where several pads share a name; then routed paths per layer and width w, separated by ;. In a path a pad name is that pad's centre, name@x,y a point inside that pad or via, vN(x,y) a via of type N, cw(c..) or ccw(c..) an arc to the next point about the centre after c; other vN are vias at no path point)
+15V: C46.2 C48.1 C49.1 C52.2 L1.1 L2.2 R53.1 | length 15.7
  Top Layer w0.5: 45.9,47.06 46.45,47.61 ; 47,47.06 46.45,47.61 ; R53.1@50.4,57.54 50.17,57.77 46.58,57.77 46.45,57.64 46.45,47.61
+15V_ISO: C17.1 C18.1 C19.1 C27.1 C28.1 C29.1 C50.2 C51.2 D20.4 D23.4 L1.2 U11.24 U12.24 | length 84
  Top Layer w0.381: C28.1@96.95,43.51 98.22,43.51 98.711,44.001 U12.24@98.711,45.506
  Top Layer w0.5: L1.2@62.81,46.46 64.89,46.46 C51.2@65.02,46.33 65.41,45.94 C50.2@67.93,45.94 C18.1@76.54,45.94 ; v1(73.43,43.56) 73.44,43.57 C17.1@73.44,45.935 ; C18.1@76.71,45.91 78.478,45.91 U11.24@78.881,45.506 ; D20.4@80.68,56.17 80.73,56.12 v1(81.99,56.12) ; v1(90.645,45.485) 90.645,44.205 91.325,43.525 C27.1@93.39,43.525 C28.1@96.935,43.525 ; D23.4@100.46,56.53 100.49,56.5 v1(101.93,56.5)
  Bottom Layer w0.5: v1(73.43,43.56) 77.9,43.56 79.83,45.49 v1@90.64,45.49 ; 79.773,45.547 C19.1@79.773,54.74 81.48,54.74 81.99,55.25 v1(81.99,56.12) ; v1(90.645,45.485) v1@90.64,45.49 ; v1(101.93,56.5) 101.93,55.3 101.31,54.68 C29.1@99.68,54.68 99.68,47.66 97.51,45.49 v1@90.64,45.49
+24VDC_LIMIT: C43.1 C47.1 C53.1 C54.2 C55.2 C57.1 Q1.1 Q1.2 Q1.3 R48.1 U13.9 U14.1 U16.7 | length 76.3
  Top Layer w0.3: R48.1@7.79,65.56 8.11,65.56 10.36,67.81 U13.9@12.23,67.81 ; R48.1@8.23,65.29 8.79,64.73 16,64.73 16.894,63.836 C43.1@16.894,62.67
  Top Layer w0.5: U16.7@10.416,45.95 10.416,47.806 11.1,48.49 15.894,48.49 C54.2@16.074,48.67 16.074,51.16 15.566,51.668 15.566,58.356 16.81,59.6 16.81,61.24 ; C43.1@16.81,61.82 C43.1@16.81,62.586 ; C43.1@16.894,62.67 C43.1@16.81,62.586 ; Q1.3@22.324,62.95 21.96,62.586 C43.1@16.81,62.586
  Top Layer w0.8: C47.1@31.63,64.464 31.824,64.27 C53.1@36.5,64.27 36.7,64.07 38.16,64.07 39.631,62.599 U14.1@41.155,62.599
  Bottom Layer w0.8: C57.1@15.566,56.11 15.566,61.226 18.804,64.464 C47.1@31.63,64.464
/RESET1: C14.2 P6.5 R31.1 U10.7 | length 55.1
  Top Layer w0.3: P6.5@221.34,3.95 222.89,5.5 222.89,17.14 220.73,19.3 220.73,40.27 222.47,42.01 227.03,42.01 227.36,42.34 227.36,46.82 R31.1@229.17,48.63 229.17,51.306 C14.2@229.174,51.31
\C\S_AO: ISO1.14 U11.7 U12.7 | length 40.5
  Top Layer w0.3: ISO1.14@68.64,38.385 70.705,38.385 72.1,36.99 v1(82.2,36.99) 82.783,37.573 U11.7@82.783,39.944 ; v1(100.32,36.66) 101.39,36.66 102.613,37.883 U12.7@102.613,39.944
  Bottom Layer w0.3: v1@82.16,37.04 82.5,36.7 100.28,36.7 v1(100.32,36.66)
BOOT1: P6.2 R34.1 U10.15 | length 49.4
  Top Layer w0.3: v1(215.09,35.26) 215.098,35.252 U10.15@217.843,35.252 ; P6.2@228.96,3.95 228.96,9.29 R34.1@229.84,10.17
  Bottom Layer w0.3: v1(215.09,35.26) 215.09,24.53 218.21,21.41 223.37,21.41 228.96,15.82 P6.2@228.96,3.95
CANRX: P1.26 U8.4 | length 109.3
  Top Layer w0.3: P1.26@90.678,25.658 92.166,24.17 112.36,24.17 v1(112.35,24.18) ; v1(192.72,23.73) U8.4@194.006,23.73
  Bottom Layer w0.3: v1(112.35,24.18) 125.2,24.18 126.62,25.6 169.31,25.6 176.02,18.89 187.88,18.89 v1(192.72,23.73)
CANTX: P1.24 U8.1 | length 119
  Top Layer w0.3: P1.24@88.138,25.658 90.536,23.26 v1(113.04,23.26) ; U8.1@197.816,23.73 v1(199.03,23.73)
  Bottom Layer w0.3: v1(113.04,23.26) 125.21,23.26 126.97,25.02 168.92,25.02 175.82,18.12 187.97,18.12 192.64,22.79 198.09,22.79 v1(199.03,23.73)
COM1: K1.2 K3.2 K5.2 K7.2 K9.2 K11.2 K13.2 K15.2 P4.9 | length 84.1
  Top Layer w1: P4.9@146.812,91.76 149.15,91.76 158.86,82.05 158.86,79.45 160.69,77.62 162.03,77.62 164.2,75.45 164.2,70.26 165.918,68.542 K15.2@166.969,68.542
  Bottom Layer w1: K15.2@166.969,68.542 K1.2@216.774,68.542
DGND: C1.1 C2.1 C3.1 C4.1 C7.2 C8.1 C9.1 C10.2 C11.1 C12.1 C13.2 C14.1 C15.1 C16.1 C30.2 C38.1 C39.1 C40.1 C41.1 C42.1 C43.2 C44.2 C45.2 C47.2 C48.2 C49.2 C52.1 C53.2 C54.1 C55.1 C57.2 C58.2 C59.1 C60.2 C61.2 CA1.2 CA2.2 D27.1 D28.1 D29.1 ISO1.2 ISO1.8 J1.3 J1.6 L3.1 P1.1 P1.2 P1.43 P1.44 P1.45 P1.46 P2.1 P2.2 P4.10 P4.32 P6.6 R20.2 R23.2 R26.1 R30.2 R49.1 R50.1 R51.1 R52.2 R55.2 TP2.1 U1.0 U1.1 U2.0 U2.1 U3.2 U3.3 U3.12 U3.21 U4.9 U5.4 U6.9 U7.5 U8.2 U9.5 U10.30 U10.31 U10.32 U13.5 U14.0 U14.3 U14.5 U15.1 U16.6 | length 201.8
  Top Layer w0.3: R50.1@11.68,76.45 14.27,76.45 R49.1@14.28,76.44 ; 12.66,76.45 12.94,76.73 ; v1(12.94,78.06) 12.94,76.73 ; 13.22,76.45 12.94,76.73 ; U13.5@16.33,69.31 v1(16.33,70.53) ; v1(38.35,57.48) D28.1@40.44,57.48 ; C3.1@125.7,39.88 129.45,39.88 ; U1.1@127.66,34.13 127.66,35.77 128.57,36.68 129.92,36.68 U1.0@129.94,36.7 ; U1.0@129.61,39.72 129.45,39.88 ; U1.0@129.61,40.04 129.45,39.88 ; U1.0@135.15,39.84 C1.1@141.11,39.84 ; v1(151.04,34.8) C4.1@151.04,39.88 154.79,39.88 ; U2.1@153.01,34.11 153.01,36.21 153.55,36.75 U2.0@155.17,36.75 ; U2.0@155.09,39.58 154.79,39.88 ; U2.0@155.09,40.18 154.79,39.88 ; U2.0@160.66,37.86 160.67,37.85 161.36,37.85 ; U2.0@160.7,39.44 160.7,39.61 161.02,39.93 ; U2.0@160.7,40.25 161.02,39.93 ; C2.1@167.38,39.93 161.02,39.93 ; v1(187.36,21.07) 188.66,21.07 R26.1@188.72,21.01 ; v1(196.84,28.68) 196.84,26.926 C7.2@196.986,26.78 ; C7.2@196.926,26.84 196.546,26.46 U8.2@196.546,23.73 196.66,23.616 196.66,21.93 197.474,21.116 R20.2@200.3,21.116 ; 225.69,73.33 225.84,73.48 226.99,73.48 v1(227.11,73.36) ; C12.1@225.69,74.13 225.69,72.55 C11.1@225.77,72.47 ; C13.2@225.86,62.47 230.76,62.47 231.61,63.32 231.61,64.496 U9.5@231.654,64.54 231.654,68.326 R30.2@231.2,68.78 ; C14.1@231.46,51.31 v1@233.67,51.31 ; R30.2@231.5,68.63 231.54,68.67 v1(232.85,68.67) ; U10.30@232.48,22.393 U10.30@232.44,22.433 U10.32@234.98,22.433 ; C8.1@235.9,72.47 C9.1@235.9,74.13 ; C8.1@235.9,73.09 236.06,73.25 v1(237.32,73.25) ; C10.2@236.09,62.57 240.61,62.57 241.75,63.71 241.75,68.17 R23.2@241.24,68.68 241.28,68.72 v1(242.59,68.72) ; U7.5@241.704,64.54 U7.5@241.75,64.494
  Top Layer w0.5: U14.3@44.555,62.599 U14.0@44.555,67.65 ; C30.2@56.1,39.374 56.381,39.655 ISO1.2@59.54,39.655 ; ISO1.8@59.54,32.035 59.545,32.03 v1(61.37,32.03) ; P1.2@60.198,25.658 P1.1@60.198,28.198 ; P1.44@113.538,25.658 P1.43@113.538,28.198 ; P1.46@116.078,25.658 P1.45@116.078,28.198 ; P6.6@218.8,3.95 218.8,3.29 220.17,1.92 233.42,1.92 234.98,3.48 U10.32@234.98,22.433
  Bottom Layer w0.3: v1(136.69,36.23) 138.12,34.8 v1(151.04,34.8) ; U6.9@161.3,35.879 161.3,38.61 v1(161.62,38.93) ; U3.21@178.131,42.495 180.47,42.495 181.445,43.47 v1(182.28,43.47) 183.769,43.47 ; 181.77,43.795 U3.2@183.769,43.795 U3.3@183.769,43.145 ; U3.12@183.769,37.295 v1(183.769,35.879) U4.9@189.3,35.879 189.3,33.94 v1(189.31,33.93) ; P6.6@218.8,3.95 218.8,3.65 220.31,2.14 224.21,2.14 225.22,3.15 225.22,6.96 C15.1@226.43,8.17 226.43,8.3 224.15,10.58 C16.1@224.15,10.7
  other v1: 62.18,39.66 53.15,40.83 233.47,51.29
ENABLE1: P1.16 U7.2 U7.3 | length 228.9
  Top Layer w0.3: v1(77.32,5.17) 78.08,4.41 178.99,4.41 181.82,7.24 181.82,19.582 187.72,25.482 187.72,45.394 187.99,45.664 187.99,45.74 190.69,48.44 221.693,48.44 226.923,53.67 235.92,53.67 239.799,57.549 239.799,59.14 ; U7.2@239.164,59.14 239.799,59.14 ; U7.3@240.434,59.14 239.799,59.14
  Bottom Layer w0.3: v1(77.32,5.17) 75.43,7.06 75.43,21.87 77.978,24.418 P1.16@77.978,25.658
ENABLE2: P1.23 U9.2 U9.3 | length 206.4
  Top Layer w0.3: v1(90.14,7.14) 91.05,7.14 91.93,6.26 178.2,6.26 180.02,8.08 180.02,19.903 186.22,26.103 186.22,46.015 186.49,46.285 186.49,46.67 190.13,50.31 221.442,50.31 226.566,55.434 227.944,55.434 229.75,57.24 229.75,59.13 ; U9.2@229.114,59.14 U9.3@230.384,59.14
  Bottom Layer w0.3: P1.23@88.138,28.198 89.42,26.916 89.42,23.814 89.84,23.394 89.84,10.02 88.79,8.97 88.79,7.57 89.22,7.14 v1(90.14,7.14)
GND_SIG: C17.2 C18.2 C19.2 C20.2 C21.2 C23.2 C24.2 C25.2 C26.2 C27.2 C28.2 C29.2 C31.2 C32.2 C34.2 C35.2 C36.2 C37.2 C50.1 C51.1 D20.1 D21.2 D22.2 D23.1 D24.2 D25.2 ISO1.9 ISO1.15 J2.2 J3.1 J4.2 J5.1 L3.2 P4.27 P4.28 R39.1 R43.1 U11.1 U11.4 U11.5 U11.6 U11.11 U11.12 U11.23 U11.25 U12.1 U12.4 U12.5 U12.6 U12.11 U12.12 U12.23 U12.25 | length 109.2
  Top Layer w0.3: ISO1.15@68.64,39.655 70.895,39.655 v1(70.91,39.64) ; P4.28@78.232,80.76 P4.27@78.232,91.76 ; U11.1@78.881,39.944 78.881,42.111 79.08,42.31 ; U11.23@79.534,45.506 79.534,42.734 79.548,42.72 U11.25@81.61,42.72 ; U11.4@80.832,39.944 80.832,41.942 U11.25@81.61,42.72 ; U11.5@81.482,39.944 81.482,41.75 U11.25@82.133,42.4 ; U11.6@82.133,39.944 U11.25@82.133,42.4 ; U11.11@85.384,39.944 U11.12@86.034,39.944 ; U12.1@98.711,39.944 98.711,42.401 99.364,43.054 U12.23@99.364,45.506 ; U12.4@100.662,39.944 100.662,42.082 101.3,42.72 U12.25@102.283,42.72 U12.25@101.963,42.4 ; U12.5@101.312,39.944 101.312,41.75 U12.25@101.963,42.4 ; U12.6@101.963,39.944 U12.25@101.963,42.4 ; U12.11@105.214,39.944 U12.12@105.864,39.944 ; U11.25@81.61,42.72 U11.25@82.453,42.72 U11.25@82.133,42.4
  Bottom Layer w0.3: C23.2@75.02,54.754 59.906,54.754 56.4,58.26 56.4,77.17 57.71,78.48 75.952,78.48 P4.28@78.232,80.76
GPIO_20: P1.41 U1.29 U2.29 | length 79
  Top Layer w0.254: v1(122.07,29.54) v1(122.07,37.94) 122.07,45.14 123.484,46.554 128.986,46.554 129.61,45.93 U1.29@129.61,43.93 ; v1(148.53,37.94) 148.07,38.37 148.07,43.322 150.442,45.694 154.366,45.694 154.96,45.1 U2.29@154.96,43.91
  Bottom Layer w0.254: P1.41@110.998,28.198 112.36,29.56 v1@122.07,29.56 ; v1(122.07,37.94) v1(148.53,37.94)
I2C2_SCL: P1.19 U3.22 U5.2 | length 163.7
  Top Layer w0.3: U5.2@44.774,20.25 44.774,19.116 45.49,18.4 50.71,18.4 51.87,19.56 51.87,22.03 53.44,23.6 83.21,23.6 83.797,24.187 84.076,24.467 84.35,24.74 84.35,26.906 P1.19@83.058,28.198 84.78,29.92 115.53,29.92 116.8,31.19 116.8,44.96 121.141,49.301 165.459,49.301 171.87,42.89 v1(175.5,42.89)
  Bottom Layer w0.3: v1(175.5,42.89) 175.755,43.145 U3.22@178.131,43.145
I2C2_SDA: P1.20 U3.23 U5.3 | length 157.6
  Top Layer w0.3: U5.3@47.314,20.25 51.218,24.154 81.594,24.154 81.594,24.194 P1.20@83.058,25.658 81.8,26.916 81.8,29.4 83.07,30.67 115.16,30.67 115.86,31.37 115.86,44.89 120.96,49.99 165.88,49.99 171.72,44.15 v1(175.47,44.15)
  Bottom Layer w0.3: v1(175.47,44.15) 175.825,43.795 U3.23@178.131,43.795
IN_PIN0: P3.1 U1.5 | length 83.2
  Top Layer w0.254: P3.1@62.992,10.16 69.184,16.352 122.782,16.352 126.38,19.95 126.38,25.68 130.24,29.54 U1.5@130.24,34.13
IN_PIN1: P3.2 U1.6 | length 86.4
  Top Layer w0.254: v1(69.48,15.3) 70.074,15.894 123.164,15.894 126.924,19.654 126.924,25.404 130.91,29.39 U1.6@130.91,34.13
  Bottom Layer w0.254: P3.2@62.992,21.16 62.992,17.55 65.242,15.3 v1(69.48,15.3)
IN_PIN2: P3.3 U1.7 | length 77.1
  Top Layer w0.254: P3.3@70.612,10.16 75.892,15.44 123.53,15.44 127.43,19.34 127.43,25.03 131.56,29.16 U1.7@131.56,34.13
IN_PIN3: P3.4 U1.8 | length 107.4
  Top Layer w0.254: v1(82.16,13.51) 83.636,14.986 123.906,14.986 127.99,19.07 127.99,24.948 132.21,29.168 U1.8@132.21,34.13
  Bottom Layer w0.254: P3.4@70.612,21.16 70.612,15.052 67.89,12.33 67.89,4.98 70.64,2.23 79.54,2.23 82.16,4.85 v1(82.16,13.51)
IN_PIN4: P3.5 U1.25 | length 91.5
  Top Layer w0.254: v1(88.25,19.27) 89.77,19.27 90.83,18.21 116.97,18.21 118.65,19.89 118.65,45.16 121.86,48.37 129.738,48.37 132.21,45.898 U1.25@132.21,43.93
  Bottom Layer w0.254: P3.5@78.232,10.16 78.232,15.832 81.67,19.27 v1@87.9,19.27
IN_PIN5: P3.6 U1.26 | length 89.2
  Top Layer w0.254: v1(89.05,18.32) 89.98,18.32 90.56,17.74 117.76,17.74 119.52,19.5 119.52,45.16 122.276,47.916 129.55,47.916 131.56,45.906 U1.26@131.56,43.93
  Bottom Layer w0.254: P3.6@78.232,21.16 82.51,21.16 84.6,23.25 87.69,23.25 89.05,21.89 v1(89.05,18.32) v1@89.05,17.98
IN_PIN6: P3.7 U1.27 | length 82.8
  Top Layer w0.254: v1(87.58,18.32) 88.637,17.263 118.153,17.263 120.38,19.49 120.38,25.05 ; 120.39,25.05 120.4,45.16 122.702,47.462 129.362,47.462 130.91,45.914 U1.27@130.91,43.93
  Bottom Layer w0.254: P3.7@85.852,10.16 85.852,16.592 v1(87.58,18.32)
IN_PIN7: P3.8 U1.28 | length 77.5
  Top Layer w0.254: P3.8@85.852,21.16 85.852,18.808 87.851,16.809 118.561,16.809 121.22,19.468 121.22,45.09 123.138,47.008 129.174,47.008 130.26,45.922 U1.28@130.26,43.93
IN_PIN8: P3.9 U1.9 | length 55.8
  Top Layer w0.254: P3.9@93.472,10.16 97.844,14.532 124.232,14.532 128.55,18.85 128.55,24.85 132.89,29.19 U1.9@132.89,34.13
IN_PIN9: P3.10 U1.10 | length 60.5
  Top Layer w0.254: v1(100.74,13.57) 101.248,14.078 124.568,14.078 129.06,18.57 129.06,24.27 133.51,28.72 U1.10@133.51,34.13
  Bottom Layer w0.254: P3.10@93.472,21.16 93.472,17.268 97.17,13.57 v1(100.74,13.57)
IN_PIN10: P3.11 U1.11 | length 49.6
  Top Layer w0.254: P3.11@101.092,10.16 104.556,13.624 124.904,13.624 129.57,18.29 129.57,23.78 134.16,28.37 U1.11@134.16,34.13
IN_PIN11: P3.12 pad.0 U1.12 | length 49.8
  Top Layer w0.254: v1(129.66,17.29) 130.74,17.29 134.81,21.36 U1.12@134.81,34.13
  Bottom Layer w0.254: pad.0@101.092,21.16 104.962,17.29 v1(129.66,17.29)
IN_PIN12: P3.13 U1.13 | length 44.4
  Top Layer w0.254: P3.13@108.712,10.16 111.722,13.17 127.74,13.17 135.46,20.89 U1.13@135.46,34.13
IN_PIN13: P3.14 U1.14 | length 43.3
  Top Layer w0.254: v1(133.9,18.19) 133.9,18.18 136.11,20.39 U1.14@136.11,34.13
  Bottom Layer w0.254: P3.14@108.712,21.16 111.722,18.15 133.87,18.15 133.9,18.18 v1(133.9,18.19)
IN_PIN14: P3.15 U1.15 | length 40.9
  Top Layer w0.254: P3.15@116.332,10.16 118.962,7.53 124.47,7.53 136.76,19.82 U1.15@136.76,34.13
IN_PIN15: P3.16 U1.24 | length 44.3
  Top Layer w0.254: P3.16@116.332,21.16 117.73,22.558 117.73,26.86 117.73,45.06 121.494,48.824 129.926,48.824 132.86,45.89 U1.24@132.86,43.93
IN_PIN16: P3.17 U2.5 | length 49.9
  Top Layer w0.254: v1(150.04,22.28) 154.21,26.45 155.2,26.45 155.61,26.86 U2.5@155.61,34.11
  Bottom Layer w0.254: P3.17@123.952,10.16 127.082,13.29 148.07,13.29 150.04,15.26 v1(150.04,22.28)
IN_PIN17: P3.18 U2.6 | length 41.9
  Top Layer w0.254: v1(153.25,24.26) 154.9,25.91 155.302,25.91 156.26,26.868 U2.6@156.26,34.11
  Bottom Layer w0.254: P3.18@123.952,21.16 127.052,24.26 v1(153.25,24.26)
IN_PIN18: P3.19 U2.7 | length 48.8
  Top Layer w0.254: P3.19@131.572,10.16 134.052,7.68 148.7,7.68 150.94,9.92 150.94,22.21 152.3,23.57 153.62,23.57 156.91,26.86 U2.7@156.91,34.11
IN_PIN19: P3.20 U2.8 | length 35.9
  Top Layer w0.254: v1(155.35,24.24) 155.35,24.26 157.53,26.44 157.56,26.44 U2.8@157.56,34.11
  Bottom Layer w0.254: P3.20@131.572,21.16 133.942,23.53 154.62,23.53 v1@155.37,24.28
IN_PIN20: P3.21 U2.25 | length 57
  Top Layer w0.254: P3.21@139.192,10.16 137.38,11.972 137.38,22.92 139.16,24.7 144.74,24.7 146.19,26.15 146.19,44.01 149.69,47.51 155.88,47.51 157.56,45.83 U2.25@157.56,43.91
IN_PIN21: P3.22 U2.26 | length 41.7
  Top Layer w0.254: P3.22@139.192,21.312 P3.22@139.192,21.16 141.982,23.95 145.2,23.95 146.644,25.394 146.644,43.822 149.878,47.056 155.504,47.056 156.91,45.65 U2.26@156.91,43.91
IN_PIN22: P3.23 U2.27 | length 48.6
  Top Layer w0.254: P3.23@146.812,10.16 143.74,13.232 143.74,21.13 147.098,24.488 147.098,43.634 150.066,46.602 155.168,46.602 156.26,45.51 U2.27@156.26,43.91
IN_PIN23: P3.24 U2.28 | length 33.5
  Top Layer w0.254: P3.24@146.812,21.16 146.812,23.032 147.563,23.783 147.563,43.457 150.254,46.148 154.682,46.148 155.61,45.22 U2.28@155.61,43.91
IN_PIN24: P3.25 U2.9 | length 29.4
  Top Layer w0.254: P3.25@154.432,10.16 151.54,13.052 151.54,21.91 152.746,23.116 155.346,23.116 158.21,25.98 U2.9@158.21,34.11
IN_PIN25: P3.26 U2.10 | length 14.8
  Top Layer w0.254: P3.26@154.432,21.16 158.86,25.588 U2.10@158.86,34.11
IN_PIN26: P3.27 U2.11 | length 25
  Top Layer w0.254: U2.11@159.51,34.11 159.51,12.702 P3.27@162.052,10.16
IN_PIN27: P3.28 U2.12 | length 13.7
  Top Layer w0.254: U2.12@160.16,34.11 160.16,26.21 162.052,24.318 P3.28@162.052,21.16
IN_PIN28: P3.29 U2.13 | length 29.2
  Top Layer w0.254: U2.13@160.81,34.11 160.81,26.47 163.25,24.03 165.97,24.03 166.69,23.31 166.69,13.142 P3.29@169.672,10.16
IN_PIN29: P3.30 U2.14 | length 19.4
  Top Layer w0.254: U2.14@161.46,34.11 161.46,26.64 163.36,24.74 168.502,24.74 169.672,23.57 P3.30@169.672,21.16
IN_PIN30: P3.31 U2.15 | length 35.9
  Top Layer w0.254: U2.15@162.11,34.11 162.11,26.86 163.42,25.55 173.07,25.55 174.65,23.97 174.65,12.802 P3.31@177.292,10.16
IN_PIN31: P3.32 U2.24 | length 69.1
  Top Layer w0.254: v1(145.22,26.74) 145.22,27.95 145.736,28.466 145.736,44.198 149.502,47.964 156.386,47.964 158.21,46.14 U2.24@158.21,43.91
  Bottom Layer w0.254: v1(145.22,26.74) 145.22,26.7 145.74,26.18 169.83,26.18 174.85,21.16 P3.32@177.292,21.16
MISO_AO: ISO1.11 U12.10 | length 39.7
  Top Layer w0.3: ISO1.11@68.64,34.575 101.805,34.575 104.59,37.36 104.59,39.917 U12.10@104.563,39.944
MOSI_AO: ISO1.12 U11.9 | length 19.9
  Top Layer w0.3: ISO1.12@68.64,35.845 70.645,35.845 71.24,35.25 83.25,35.25 84.083,36.083 U11.9@84.083,39.944
NetC5_1: C5.1 C6.1 U3.24 | length 5.5
  Bottom Layer w0.3: U3.24@178.131,44.445 179.385,44.445 179.68,44.74 C5.1@179.68,48.61
NetC22_1: C22.1 R37.1 U11.21 | length 14.3
  Top Layer w0.3: U11.21@80.835,45.506 80.835,46.925 82.3,48.39 R37.1@82.3,49.2 ; v1(80.92,49.3) 82.73,49.3 R37.1@82.75,49.28
  Bottom Layer w0.3: v1(80.92,49.3) 80.92,50.36 82.28,51.72 C22.1@87.44,51.72
NetC22_2: C22.2 U11.17 | length 6.3
  Top Layer w0.3: U11.17@83.436,45.506 83.436,46.666 83.58,46.81 84.71,46.81 85.545,47.645 v1@85.685,47.645
  Bottom Layer w0.3: v1(85.64,47.69) 87.384,49.434 C22.2@87.44,49.434
NetC24_1: C24.1 U11.14 U11.15 | length 6.6
  Top Layer w0.3: U11.15@84.736,45.506 U11.14@85.386,45.506 85.386,46.576 85.71,46.9 87.27,46.9 88.15,47.78 88.15,49.14 C24.1@88.35,49.34
NetC25_1: C25.1 U11.18 | length 5.4
  Top Layer w0.3: U11.18@82.785,45.506 82.785,46.895 83.27,47.38 84.18,47.38 85.32,48.52 C25.1@85.32,49.36
NetC26_1: C26.1 D22.1 J3.2 R40.2 | length 12
  Top Layer w0.5: R40.2@84.3,57.254 84.5,57.454 D22.1@84.5,59.5 84.5,60.43 J3.2@86.41,62.34
  Bottom Layer w0.5: C26.1@84.71,57.04 84.71,60.64 J3.2@86.41,62.34
NetC33_1: C33.1 R42.1 U12.21 | length 10.8
  Top Layer w0.254: U12.21@100.665,45.506 100.665,47.125 101.79,48.25 R42.1@101.79,49.14 ; v1(100.69,49.66) 102.1,49.66 R42.1@102.2,49.56
  Bottom Layer w0.254: v1(100.69,49.66) 102.64,51.61 C33.1@105,51.61
NetC33_2: C33.2 U12.17 | length 5
  Top Layer w0.254: U12.17@103.266,45.506 103.266,46.696 103.482,46.912 104.262,46.912 v1(104.78,47.43)
  Bottom Layer w0.254: v1(104.78,47.43) 104.78,49.104 C33.2@105,49.324
NetC35_1: C35.1 U12.14 U12.15 | length 5.8
  Top Layer w0.254: U12.15@104.566,45.506 U12.14@105.216,45.506 105.216,46.526 106.27,47.58 107.03,47.58 107.53,48.08 C35.1@107.53,49.3
NetC36_1: C36.1 U12.18 | length 5
  Top Layer w0.254: U12.18@102.615,45.506 102.615,47.265 102.77,47.42 103.66,47.42 104.6,48.36 C36.1@104.6,49.21
NetC37_1: C37.1 D25.1 J5.2 R44.2 | length 12.1
  Top Layer w0.5: R44.2@104.5,57.184 104.69,57.374 104.69,60.2 J5.2@106.7,62.21
  Bottom Layer w0.5: C37.1@104.55,56.98 104.55,60.06 J5.2@106.7,62.21
NetC45_1: C45.1 U13.6 | length 5.1
  Top Layer w0.3: C45.1@7.84,71.13 8.22,71.13 10.04,69.31 U13.6@12.23,69.31
NetC46_1: C46.1 R52.1 R53.2 U14.4 | length 9
  Top Layer w0.254: R53.2@50.4,59.826 50.406,59.82 R52.1@52.47,59.82
  Top Layer w0.5: U14.4@46.255,62.599 46.255,59.916 C46.1@46.45,59.72 50.294,59.72 R53.2@50.4,59.826
NetC56_1: C56.1 U16.1 | length 5.5
  Top Layer w0.3: U16.1@11.686,51.35 11.69,51.354 v1(11.69,53.31)
  Bottom Layer w0.3: v1(11.69,53.31) 11.69,49.89 C56.1@11.75,49.83
NetC56_2: C56.2 D29.2 L4.1 U16.8 | length 19.4
  Top Layer w0.254: v1(11.74,44.43) 11.74,43.65 13.49,41.9 L4.1@17.19,41.9
  Top Layer w0.3: D29.2@5.29,40.4 8.54,43.65 11.74,43.65 ; U16.8@11.686,45.95 11.686,44.484 v1(11.74,44.43)
  Bottom Layer w0.3: v1(11.74,44.43) 11.74,47.534 C56.2@11.75,47.544
NetD1_2: D1.2 U1.16 | length 5.2
  Top Layer w0.3: U1.16@137.41,34.13 137.41,35.4 138.69,36.68 D1.2@140.76,36.68
NetD2_2: D2.2 U2.16 | length 4.9
  Top Layer w0.3: U2.16@162.76,34.11 162.76,36.05 163.43,36.72 D2.2@165.41,36.72
NetD3_1: D3.1 R4.2 | length 3
  Top Layer w0.3: D3.1@163.093,52.887 163.156,52.95 v1(164.59,52.95)
  Bottom Layer w0.3: R4.2@163.146,52.82 163.276,52.95 v1(164.59,52.95)
NetD4_1: D4.1 R3.2 | length 3.5
  Top Layer w0.3: D4.1@218.73,52.86 v1(220.64,52.86)
  Bottom Layer w0.3: R3.2@219.086,52.81 219.136,52.86 v1(220.64,52.86)
NetD5_1: D5.1 R5.2 | length 2.9
  Top Layer w0.3: D5.1@212.933,52.847 212.946,52.86 v1(214.44,52.86)
  Bottom Layer w0.3: R5.2@213.076,52.81 213.126,52.86 v1(214.44,52.86)
NetD6_1: D6.1 R6.2 | length 3.2
  Top Layer w0.3: D6.1@157.063,52.907 157.106,52.95 v1(158.7,52.95)
  Bottom Layer w0.3: R6.2@157.176,52.86 157.266,52.95 v1(158.7,52.95)
NetD7_1: D7.1 R7.2 | length 3.1
  Top Layer w0.3: D7.1@206.833,52.817 206.876,52.86 v1(208.51,52.86)
  Bottom Layer w0.3: R7.2@207.076,52.81 207.126,52.86 v1(208.51,52.86)
NetD8_1: D8.1 R8.1 | length 3.2
  Top Layer w0.3: D8.1@151.193,52.867 151.276,52.95 v1(152.78,52.95)
  Bottom Layer w0.3: R8.1@151.3,52.79 151.46,52.95 v1(152.78,52.95)
NetD9_1: D9.1 R9.2 | length 3.1
  Top Layer w0.3: D9.1@200.863,52.837 200.886,52.86 v1(202.45,52.86)
  Bottom Layer w0.3: R9.2@201.016,52.81 201.066,52.86 v1(202.45,52.86)